# EAGLE board Aux Board V7.0 (EAGLE 9.6.2)
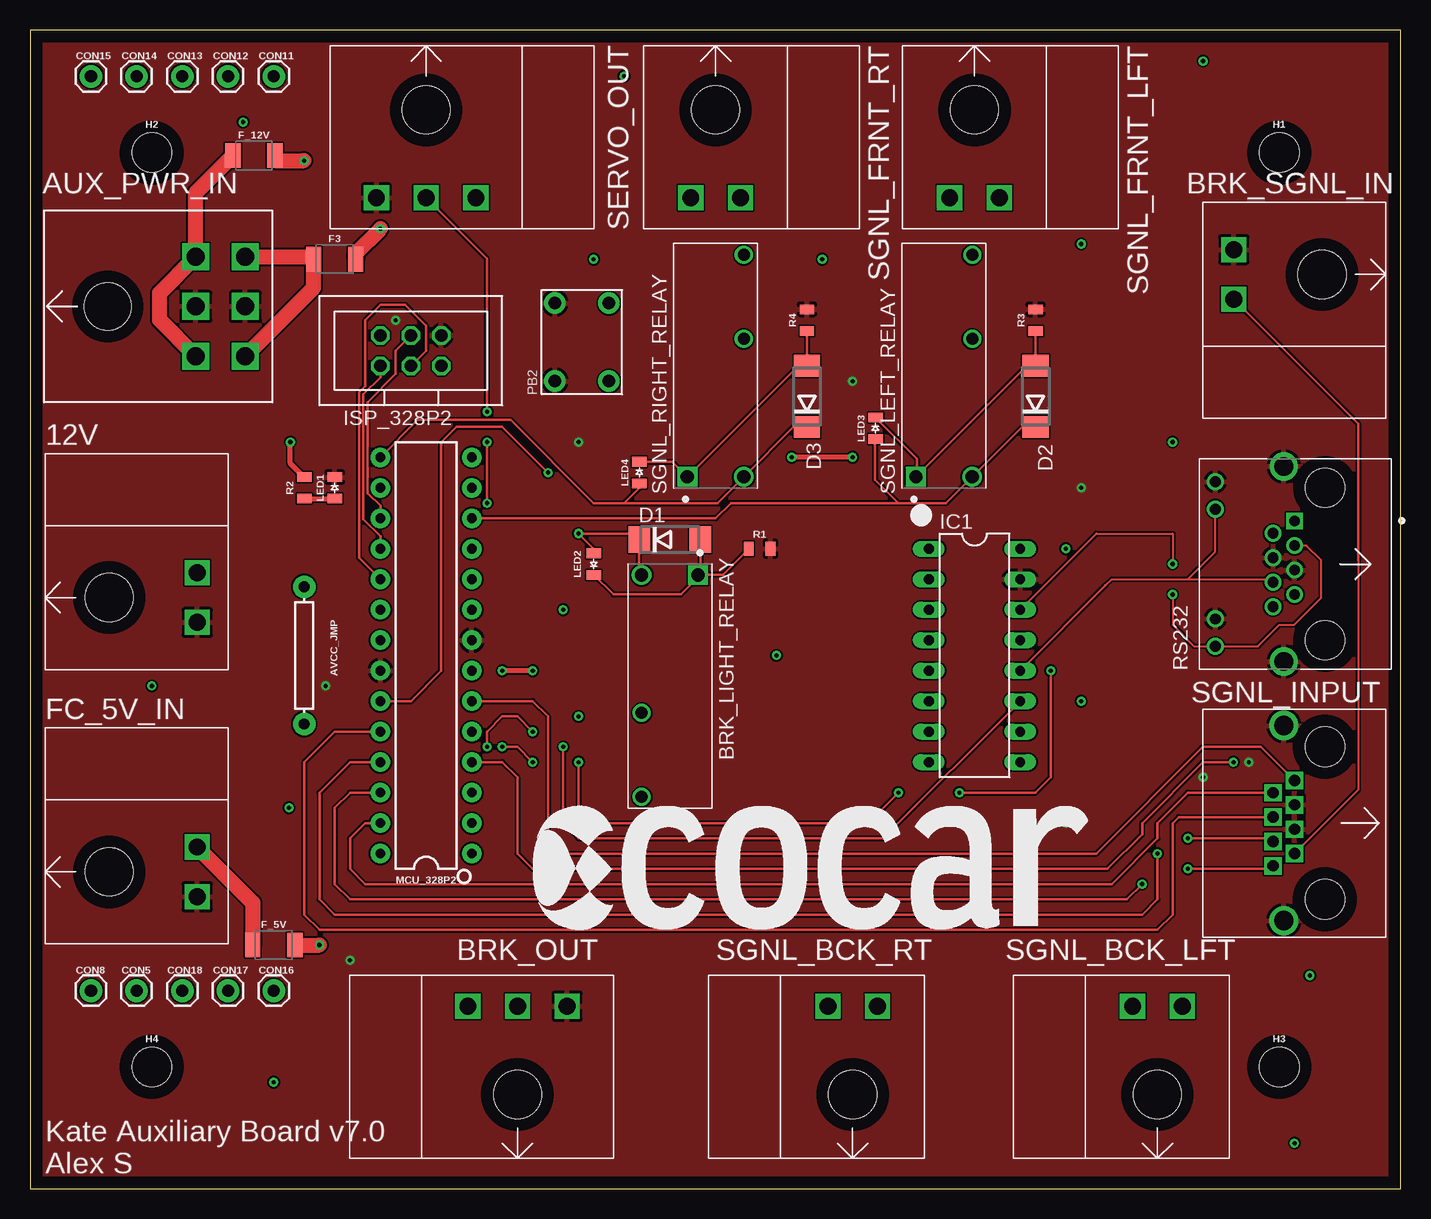
[diagram p0: board, top side]
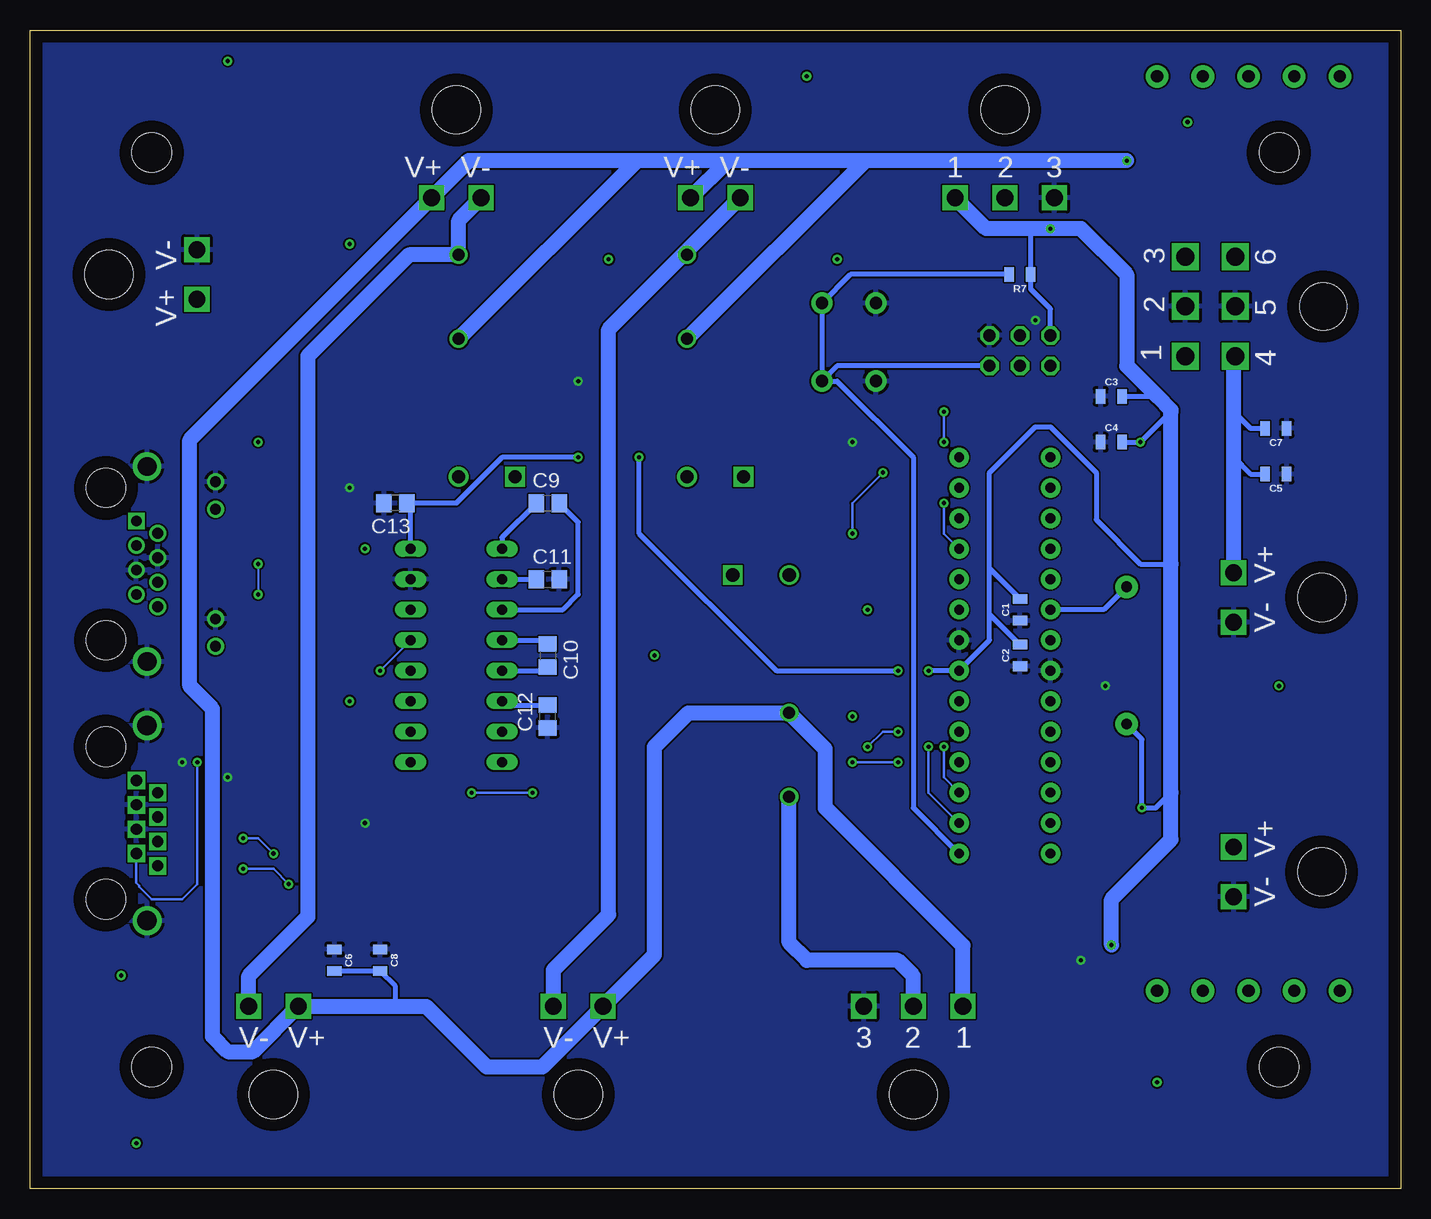
[diagram p1: board, bottom side, seen from below]

Size 114.28 x 96.57 mm. Coordinates in mm from the lower left corner, seen from the top.
Outline: 0,0 114.28,0 114.28,96.57 0,96.57 0,0
Copper layers (1*16): Top 0.035mm / dielectric 1.5mm / Bottom 0.035mm
Design rules "default": minimum track width 6mil, minimum drill 0.35mm, track to track 6mil, track to pad 6mil, pad to pad 6mil, via to via 6mil, smd to smd 6mil, copper to edge 40mil, drill to drill 6mil, minimum pad ring 10mil, minimum via ring 8mil, stop-mask expansion 4mil, vias tented up to drill 0mil, thermal gap 10mil

## Footprints (pad centres in the part's own frame; a part is rotated, then mirrored left to right if it is on the bottom)
TE_2-PIN = drill 1.4 square: 1 -2.07,12.67; 2 2.07,12.67 | hole 4: 0,5.33
TE_6-PIN = drill 1.5 square: 1 4.14,11.48; 2 0,11.48; 3 -4.14,11.48; 4 4.14,7.34; 5 0,7.34; 6 -4.14,7.34 | hole 3.91: 0,0
JUMPER-0.45 = drill 0.9 pad 1.88: P$1 -5.715,0; P$2 5.715,0
TE_1-1721081-2 = drill 1.1 square: 1 -9.25,2.35 | drill 1.1: 2 -9.25,-2.35 | drill 1: 3 2.25,-2.35; 4 9.25,-2.35
TE_3-PIN = drill 1.4 square: 1 -4.14,12.67; 2 0,12.67; 3 4.14,12.67 | hole 4: 0,5.33
0805 = smd 0.8 x 1.2: 1 -0.9,0; 2 0.9,0
C0805 = smd 1.3 x 1.5: 1 -0.95,0; 2 0.95,0
1X01 = drill 1.016 pad 1.88: 1 0,0
DO214AA = smd 1.8 x 2.2: A 2.55,0; C -2.55,0
1210 = smd 1.27 x 2.06: 1 -1.755,0; 2 1.755,0
STAND-OFF = hole 3.302: 0,0
DIP16 = drill 0.813 long: 1 -8.89,-3.81; 2 -6.35,-3.81; 3 -3.81,-3.81; 4 -1.27,-3.81; 5 1.27,-3.81; 6 3.81,-3.81; 7 6.35,-3.81; 8 8.89,-3.81; 9 8.89,3.81; 10 6.35,3.81; 11 3.81,3.81; 12 1.27,3.81; 13 -1.27,3.81; 14 -3.81,3.81; 15 -6.35,3.81; 16 -8.89,3.81
ISP_CONNECTOR = drill 1.016 octagon: 1 2.54,1.27; 2 2.54,-1.27; 3 0,1.27; 4 0,-1.27; 5 -2.54,1.27; 6 -2.54,-1.27
0805_LED = smd 0.8 x 1.2: 1 -0.9,0; 2 0.9,0
DIP28 = drill 0.813 pad 1.626: 1 -16.51,-3.81; 2 -13.97,-3.81; 3 -11.43,-3.81; 4 -8.89,-3.81; 5 -6.35,-3.81; 6 -3.81,-3.81; 7 -1.27,-3.81; 8 1.27,-3.81; 9 3.81,-3.81; 10 6.35,-3.81; 11 8.89,-3.81; 12 11.43,-3.81; 13 13.97,-3.81; 14 16.51,-3.81; 15 16.51,3.81; 16 13.97,3.81; 17 11.43,3.81; 18 8.89,3.81; 19 6.35,3.81; 20 3.81,3.81; 21 1.27,3.81; 22 -1.27,3.81; 23 -3.81,3.81; 24 -6.35,3.81; 25 -8.89,3.81; 26 -11.43,3.81; 27 -13.97,3.81; 28 -16.51,3.81
PUSHBUTTON = drill 1.04 pad 1.778: 1 0,0; 2 6.5,0; 3 0,4.5; 4 6.5,4.5
RJ45_LED = drill 0.89 square: 1 3.58,2.54 | drill 0.89: 2 2.56,4.32; 3 1.54,2.54; 4 0.52,4.32; 5 -0.5,2.54; 6 -1.52,4.32; 7 -2.54,2.54; 8 -3.56,4.32; 9 -6.86,9.14; 10 -4.57,9.14; 11 4.57,9.14; 12 6.86,9.14 | drill 1.57: S1 -8.13,3.43; S2 8.13,3.43 | hole 3.25: -6.35,0; 6.35,0
RJ45 = drill 0.94 square: 1 9.9,2.54; 2 8.88,4.32; 3 7.87,2.54; 4 6.85,4.32; 5 5.84,2.54; 6 4.82,4.32; 7 3.81,2.54; 8 2.79,4.32 | drill 1.62: 9 -1.78,3.43; 10 14.48,3.43 | hole 3.3: 0,0; 12.7,0

## Placement (x,y rotation side)
12V  TE_2-PIN  [TE_2-PIN]  1.27,49.28 270 top
AUX_PWR_IN  TE_6-PIN  [TE_6-PIN]  6.48,73.53 270 top
AVCC_JMP  [JUMPER-0.45]  22.86,44.45 90 top
BRK_LIGHT_RELAY  RELAY_SPST-NO_3A  [TE_1-1721081-2]  53.34,41.91 270 top
BRK_OUT  TE_3-PIN  [TE_3-PIN]  40.64,2.54 0 top
BRK_SGNL_IN  TE_2-PIN  [TE_2-PIN]  113.03,76.2 90 top
C1  0.1u  [0805]  31.75,48.26 90 bottom
C2  10n  [0805]  31.75,44.45 90 bottom
C3  10n  [0805]  24.13,66.04 0 bottom
C4  0.1u  [0805]  24.13,62.23 0 bottom
C5  0.1u  [0805]  10.41,59.56 180 bottom
C6  10n  [0805]  88.9,19.05 270 bottom
C7  10n  [0805]  10.41,63.37 180 bottom
C8  0.1u  [0805]  85.09,19.05 270 bottom
C9  0.1µF  [C0805]  71.12,57.15 0 bottom
C10  0.1µF  [C0805]  71.12,44.45 270 bottom
C11  0.1µF  [C0805]  71.12,50.8 0 bottom
C12  0.1µF  [C0805]  71.12,39.37 90 bottom
C13  0.1µF  [C0805]  83.82,57.15 180 bottom
CON5  1X01  [1X01]  8.89,16.51 0 top
CON8  1X01  [1X01]  5.08,16.51 0 top
CON11  1X01  [1X01]  20.32,92.71 0 top
CON12  1X01  [1X01]  16.51,92.71 0 top
CON13  1X01  [1X01]  12.7,92.71 0 top
CON14  1X01  [1X01]  8.89,92.71 0 top
CON15  1X01  [1X01]  5.08,92.71 0 top
CON16  1X01  [1X01]  20.32,16.51 0 top
CON17  1X01  [1X01]  16.51,16.51 0 top
CON18  1X01  [1X01]  12.7,16.51 0 top
D1  [DO214AA]  53.34,54.1 0 top
D2  [DO214AA]  83.82,66.04 90 top
D3  [DO214AA]  64.77,66.04 90 top
F3  [1210]  25.4,77.47 0 top
F_5V  [1210]  20.32,20.32 0 top
F_12V  [1210]  18.67,86.11 0 top
FC_5V_IN  TE_2-PIN  [TE_2-PIN]  1.27,26.42 270 top
H1  STAND-OFF  [STAND-OFF]  104.14,86.36 0 top
H2  STAND-OFF  [STAND-OFF]  10.16,86.36 0 top
H3  STAND-OFF  [STAND-OFF]  104.14,10.16 0 top
H4  STAND-OFF  [STAND-OFF]  10.16,10.16 0 top
IC1  RS232-TTL_MAX232E  [DIP16]  78.74,44.45 270 top
ISP_328P2  ISP  [ISP_CONNECTOR]  31.75,69.85 180 top
LED1  [0805_LED]  25.4,58.42 90 top
LED2  [0805_LED]  46.99,52.07 270 top
LED3  [0805_LED]  70.48,63.37 90 top
LED4  [0805_LED]  50.8,59.69 90 top
MCU_328P2  328P  [DIP28]  33.02,44.45 90 top
PB2  [PUSHBUTTON]  48.26,67.31 90 top
R1  1K  [0805]  60.83,53.34 0 top
R2  2K  [0805]  22.86,58.42 90 top
R3  1K  [0805]  83.82,72.39 90 top
R4  1K  [0805]  64.77,72.39 90 top
R7  10K  [0805]  31.75,76.2 180 bottom
RS232  RJ45_LED  [RJ45_LED]  107.95,52.07 90 top
SERVO_OUT  TE_3-PIN  [TE_3-PIN]  33.02,95.25 180 top
SGNL_BCK_LFT  TE_2-PIN  [TE_2-PIN]  93.98,2.54 0 top
SGNL_BCK_RT  TE_2-PIN  [TE_2-PIN]  68.58,2.54 0 top
SGNL_FRNT_LFT  TE_2-PIN  [TE_2-PIN]  78.74,95.25 180 top
SGNL_FRNT_RT  TE_2-PIN  [TE_2-PIN]  57.15,95.25 180 top
SGNL_INPUT  RJ45  [RJ45]  107.95,24.13 90 top
SGNL_LEFT_RELAY  RELAY_SPST-NO_3A  [TE_1-1721081-2]  76.2,68.58 90 top
SGNL_RIGHT_RELAY  RELAY_SPST-NO_3A  [TE_1-1721081-2]  57.15,68.58 90 top
U$1  [ECOCAR_LOGO_2018]  41.91,21.59 0 top

## Library data of the parts
12V AUX_PWR_IN BRK_OUT BRK_SGNL_IN FC_5V_IN SERVO_OUT SGNL_BCK_LFT SGNL_BCK_RT SGNL_FRNT_LFT SGNL_FRNT_RT SGNL_INPUT = EcoCar-Connectors
AVCC_JMP C1-C8 R1-R4 R7 = EcoCar-Passives
BRK_LIGHT_RELAY SGNL_LEFT_RELAY SGNL_RIGHT_RELAY = EcoCar-Electromechanical; AVAILABILITY: In Stock; COMMENT: 1-1721081-2; DESCRIPTION: General Purpose Relay SPST-NO (1 Form A) 12VDC Coil Through Hole; MF: TE Connectivity; MP: 1-1721081-2; PACKAGE: None; PRICE: None
C9-C13 = rcl; SPICEPREFIX: C
CON5 CON8 CON11-CON18 = EcoCar-Connectors-2.54mm
D1-D3 LED1-LED4 = EcoCar-Discrete-Semiconductors
F3 F_5V F_12V = EcoCar-Fuses-Protection
H1-H4 U$1 = EcoCar-Miscellaneous
IC1 = EcoCar-Integrated-Circuits
ISP_328P2 = EcoCar-Microcontrollers
MCU_328P2 = EcoCar-Microcontrollers; PROD_ID: IC-09136
PB2 = EcoCar-Electromechanical
RS232 = EcoCar-Connectors; AVAILABILITY: In Stock; COMMENT: 6116173-4; DESCRIPTION: Conn Telephone/Telecom F 8 POS 2.54mm Solder RA Thru-Hole 12 Terminal 1 Port Tray Cat 5; EU_ROHS_COMPLIANCE: Compliant; MF: TE Connectivity; MP: 6116173-4; PACKAGE: None; PRICE: None; PURCHASE-URL: https://pricing.snapeda.com/search/part/6116173-4/?ref=eda

## Nets
5V: AVCC_JMP.P$1 C1.2 C2.2 C3.2 C4.2 C13.1 F3.2 F_5V.2 IC1.16 ISP_328P2.2 MCU_328P2.7 R2.2 R7.1 SERVO_OUT.1
12V: BRK_LIGHT_RELAY.3 BRK_OUT.1 C6.2 C8.2 F_12V.2 SGNL_BCK_LFT.1 SGNL_BCK_RT.1 SGNL_FRNT_LFT.1 SGNL_FRNT_RT.1 SGNL_LEFT_RELAY.3 SGNL_RIGHT_RELAY.3
12V_PRE_FUSE: 12V.1 AUX_PWR_IN.4 AUX_PWR_IN.6 C5.2 C7.2 F_12V.1
BRK_12V: BRK_LIGHT_RELAY.4 BRK_OUT.2
BRK_I/P: BRK_SGNL_IN.1 MCU_328P2.4 SGNL_INPUT.7
BRK_O/P: BRK_LIGHT_RELAY.2 D1.C LED2.1 MCU_328P2.23
GND: 12V.2 AUX_PWR_IN.2 AUX_PWR_IN.5 BRK_OUT.3 BRK_SGNL_IN.2 C1.1 C2.1 C3.1 C4.1 C5.1 C6.1 C7.1 C8.1 C11.2 C12.1 C13.2 FC_5V_IN.2 IC1.15 ISP_328P2.6 LED1.2 MCU_328P2.8 MCU_328P2.22 PB2.3 PB2.4 R1.2 R3.2 R4.2 RS232.4 RS232.5 RS232.10 RS232.12 RS232.S1 RS232.S2 SERVO_OUT.3 SGNL_INPUT.3 SGNL_INPUT.5 SGNL_INPUT.9 SGNL_INPUT.10
HAZARD_I/P: MCU_328P2.6 SGNL_INPUT.1
MISO_328P2: ISP_328P2.1 MCU_328P2.18
MOSI_328P2: ISP_328P2.4 MCU_328P2.17
N$1: BRK_LIGHT_RELAY.1 D1.A LED2.2 R1.1
N$2: AVCC_JMP.P$2 MCU_328P2.20
N$6: C9.2 IC1.3
N$7: C10.2 IC1.5
N$8: LED1.1 R2.1
N$9: C9.1 IC1.1
N$10: C10.1 IC1.4
N$11: C11.1 IC1.2
N$12: C12.2 IC1.6
N$13: D2.A LED3.2 R3.1 SGNL_LEFT_RELAY.1
N$14: D3.A LED4.2 R4.1 SGNL_RIGHT_RELAY.1
N$33: F_5V.1 FC_5V_IN.1
N$36: AUX_PWR_IN.1 AUX_PWR_IN.3 F3.1
RESET_328P2: ISP_328P2.5 MCU_328P2.1 PB2.1 PB2.2 R7.2
RS_RX: IC1.12 RS232.6 RS232.11
RS_TX: IC1.14 RS232.3 RS232.9
RX: IC1.13 MCU_328P2.2
SCK_328P2: ISP_328P2.3 MCU_328P2.19
SERVO_ADC_I/P: MCU_328P2.27 SGNL_INPUT.2
SERVO_I/P: MCU_328P2.24 SGNL_INPUT.4
SERVO_PWM_O/P: MCU_328P2.11 SERVO_OUT.2
SGNL_LEFT_12V: SGNL_BCK_LFT.2 SGNL_FRNT_LFT.2 SGNL_LEFT_RELAY.4
SGNL_LEFT_I/P: MCU_328P2.25 SGNL_INPUT.6
SGNL_LEFT_O/P: D2.C LED3.1 MCU_328P2.12 SGNL_LEFT_RELAY.2
SGNL_RIGHT_12V: SGNL_BCK_RT.2 SGNL_FRNT_RT.2 SGNL_RIGHT_RELAY.4
SGNL_RIGHT_I/P: MCU_328P2.26 SGNL_INPUT.8
SGNL_RIGHT_O/P: D3.C LED4.1 MCU_328P2.15 SGNL_RIGHT_RELAY.2
TX: IC1.11 MCU_328P2.3

## Tracks (layer width: path | path; a pad name or v marks a point on that pad's centre or on a via)
5V  (via drill 0.35)
  Top 0.406: v41.91,43.18 v39.37,43.18 | v68.58,60.96 v63.5,60.96 | R2.2 21.71,60.47 v21.71,62.23
  Top 1.27: F3.2 27.16,77.95 v29.21,80.01 | F_5V.2 v24.13,20.32
  Bottom 0.406: ISP_328P2.2 29.21,73.33 30.85,74.97 R7.1 30.85,79.64 30.48,80.01 | 34.29,47.89 34.29,45.72 MCU_328P2.7 v39.37,43.18 | 34.29,47.89 34.29,51.7 | 34.29,51.7 34.29,59.69 30.48,63.5 29.21,63.5 25.4,59.69 25.4,55.76 21.71,52.07 19.17,52.07 | C2.2 34.29,47.89 | v41.91,43.18 52.07,43.18 63.5,54.61 v63.5,60.96 | v68.58,60.96 74.93,60.96 78.74,57.15 C13.1 82.55,56.83 IC1.16 | C4.2 v21.71,62.23 19.17,64.77 | AVCC_JMP.P$1 21.59,37.47 v21.59,31.75 20.44,31.75 19.17,33.02 | C3.2 20.32,66.04 | C1.2 34.29,51.7
  Bottom 1.27: SERVO_OUT.1 34.59,80.01 30.48,80.01 v29.21,80.01 26.67,80.01 22.86,76.2 22.86,68.58 20.32,66.04 19.17,64.89 19.17,64.77 19.17,52.07 19.17,33.02 19.17,29.09 24.13,24.13 v24.13,20.32
12V  (via drill 0.35)
  Top 1.27: v22.85,85.69 20.42,85.69 F_12V.2
  Bottom 0.406: 83.82,15.21 83.82,16.88 C8.2 C6.2
  Bottom 1.27: v22.85,85.69 44.64,85.69 | 44.64,85.69 56.11,85.69 | SGNL_FRNT_RT.1 56.11,85.69 | 56.11,85.69 63.69,85.69 | 63.69,85.69 77.7,85.69 SGNL_FRNT_LFT.1 100.97,62.42 100.97,41.91 99.06,40.01 99.06,12.7 97.79,11.43 95.69,11.43 SGNL_BCK_LFT.1 83.82,15.21 81.25,15.21 76.2,10.16 71.56,10.16 SGNL_BCK_RT.1 62.23,19.49 62.23,36.83 59.4,39.66 BRK_LIGHT_RELAY.3 47.98,36.65 47.98,31.75 36.5,20.27 BRK_OUT.1 | SGNL_LEFT_RELAY.3 63.69,85.69 | SGNL_RIGHT_RELAY.3 44.64,85.69
12V_PRE_FUSE
  Top 1.27: F_12V.1 13.82,83.01 AUX_PWR_IN.6 10.79,74.65 10.79,72.42 AUX_PWR_IN.4
  Bottom 0.406: 13.94,64.77 12.54,63.37 C7.2 | 13.94,60.96 12.54,59.56 C5.2
  Bottom 1.27: 12V.1 13.94,60.96 13.94,64.77 13.94,69.27 AUX_PWR_IN.4
BRK_12V
  Bottom 1.27: BRK_OUT.2 40.64,17.75 41.94,19.05 49.53,19.05 50.99,20.51 BRK_LIGHT_RELAY.4
BRK_I/P  (via drill 0.35)
  Top 0.152: 110.72,52.4 110.72,33.25 SGNL_INPUT.7
  Top 0.203: 110.72,52.4 110.72,63.77 BRK_SGNL_IN.1 | MCU_328P2.4 39.37,35.56 40.64,34.29 40.64,27.94 41.91,26.67 89.81,26.67 92.71,29.57 92.71,30.48 97.79,35.56 v100.33,35.56
  Bottom 0.203: v100.33,35.56 100.33,25.4 101.6,24.13 104.14,24.13 105.18,25.17 105.18,25.28 105.41,25.5 SGNL_INPUT.7
BRK_O/P  (via drill 0.35)
  Top 0.203: MCU_328P2.23 31.75,40.64 34.29,43.18 34.29,62.23 35.56,63.5 39.37,63.5 v43.18,59.69 | BRK_LIGHT_RELAY.2 50.79,51.36 D1.C 50.28,54.61 v45.72,54.61 46.99,53.34 LED2.1
  Bottom 0.203: v43.18,59.69 45.72,57.15 v45.72,54.61
GND  (via drill 0.35)
  other vias: 26.67,19.05 30.48,72.39 24.64,41.91 68.58,67.31 101.6,35.56 97.79,34.29 86.36,30.48 87.63,58.42 45.72,62.23
  pour Top: -2.54,99.06 -2.54,-2.54 116.84,-2.54 116.84,99.06
  pour Bottom: -5.08,101.6 -5.08,-5.08 119.38,-5.08 119.38,101.6
HAZARD_I/P
  Top 0.203: MCU_328P2.6 41.91,40.64 43.18,39.37 43.18,29.21 44.45,27.94 88.9,27.94 97.79,36.83 102.61,36.83 SGNL_INPUT.1
MISO_328P2
  Top 0.203: ISP_328P2.1 29.21,67.65 27.79,66.22 27.79,55.79 29.21,54.37 MCU_328P2.18
MOSI_328P2
  Top 0.203: MCU_328P2.17 29.21,56.91 28.14,57.98 28.14,65.57 30.48,67.91 30.48,69.85 ISP_328P2.4
N$1
  Top 0.203: R1.1 57.75,51.16 55.88,51.16 | 55.88,51.16 BRK_LIGHT_RELAY.1 55.89,51.36 D1.A | LED2.2 48.63,49.53 54.25,49.53 55.88,51.16
N$2
  Bottom 0.406: AVCC_JMP.P$2 24.77,48.26 MCU_328P2.20
N$3  (via drill 0.35)
  other vias: 20.32,8.89
N$4  (via drill 0.35)
  other vias: 44.45,48.26
N$5  (via drill 0.35)
  other vias: 46.99,77.47
N$6
  Bottom 0.406: IC1.3 69.85,48.26 68.58,49.53 68.58,55.56 C9.2
N$7
  Bottom 0.406: IC1.5 71.44,43.18 C10.2
N$8
  Top 0.406: R2.1 LED1.1
N$9
  Bottom 0.406: C9.1 74.93,54.29 IC1.1
N$10
  Bottom 0.406: IC1.4 71.44,45.72 C10.1
N$11
  Bottom 0.406: IC1.2 C11.1
N$12
  Bottom 0.406: IC1.6 74.61,40.32 C12.2
N$13
  Top 0.203: R3.1 D2.A 83.11,68.59 73.94,59.42 | SGNL_LEFT_RELAY.1 73.94,59.42 | LED3.2 73.94,60.82 73.94,59.42
N$14
  Top 0.203: R4.1 D3.A 64.06,68.59 SGNL_RIGHT_RELAY.1 53.54,60.59 LED4.2
N$15  (via drill 0.35)
  other vias: 17.78,88.9
N$16  (via drill 0.35)
  other vias: 105.41,3.81
N$17  (via drill 0.35)
  other vias: 106.68,17.78
N$18  (via drill 0.35)
  other vias: 97.79,93.98
N$19  (via drill 0.35)
  other vias: 95.25,62.23
N$20  (via drill 0.35)
  other vias: 87.63,78.74
N$21  (via drill 0.35)
  other vias: 66.04,77.47
N$22  (via drill 0.35)
  other vias: 49.53,92.71
N$23  (via drill 0.35)
  other vias: 10.16,41.91
N$24  (via drill 0.35)
  other vias: 62.23,44.45
N$25  (via drill 0.35)
  other vias: 45.72,39.37
N$26  (via drill 0.35)
  other vias: 87.63,40.64
N$27  (via drill 0.35)
  other vias: 86.36,53.34
N$33
  Top 1.27: FC_5V_IN.1 18.57,23.86 F_5V.1
N$36
  Top 1.27: AUX_PWR_IN.1 23.64,75.08 F3.1 23.44,77.67 AUX_PWR_IN.3
RESET_328P2
  Bottom 0.406: R7.2 45.87,76.2 PB2.2 PB2.1 | PB2.1 46.99,67.31 40.64,60.96 40.64,31.75 MCU_328P2.1 | ISP_328P2.5 46.99,68.58 PB2.1
RS_RX
  Top 0.152: RS232.6 103.38,50.8 96.52,50.8 | 89.66,50.29 90.17,50.8 96.52,50.8 | 96.52,50.8 98.81,53.09 RS232.11
  Top 0.203: IC1.12 89.66,50.29
RS_TX  (via drill 0.35)
  Top 0.152: 88.89,54.6 88.9,54.61 95.25,54.61 v95.25,52.07 | RS232.3 106.4,53.61 107.63,52.38 107.63,49.53 107.63,49.35 107.63,49.25 105.38,46.99 104.14,46.99 102.36,45.21 RS232.9 97.03,45.21 95.25,46.99 v95.25,49.53
  Top 0.203: IC1.14 88.89,54.6
  Bottom 0.152: v95.25,52.07 v95.25,49.53
RX  (via drill 0.35)
  Top 0.203: v39.37,36.83 40.64,36.83 v41.91,35.56 | v45.72,35.56 45.72,31.75 46.99,30.48 69.85,30.48 v72.39,33.02 | v77.47,33.02 83.82,33.02 85.09,34.29 v85.09,43.18
  Bottom 0.203: MCU_328P2.2 39.37,33.02 v39.37,36.83 | v41.91,35.56 v45.72,35.56 | v72.39,33.02 v77.47,33.02 | v85.09,43.18 IC1.13
SCK_328P2
  Top 0.203: MCU_328P2.19 27.43,52.58 27.43,66.37 27.94,66.88 27.94,72.39 29.21,73.66 31.28,73.66 33.02,71.92 33.02,69.85 ISP_328P2.3
SERVO_ADC_I/P
  Top 0.203: MCU_328P2.27 27.94,30.48 26.67,29.21 26.67,26.67 27.94,25.4 90.17,25.4 93.98,29.21 93.98,30.48 96.52,33.02 SGNL_INPUT.2
SERVO_I/P
  Top 0.203: MCU_328P2.24 25.4,38.1 22.86,35.56 22.86,22.86 24.13,21.59 93.98,21.59 95.25,22.86 95.25,30.48 95.75,30.98 SGNL_INPUT.4
SERVO_PWM_O/P  (via drill 0.35)
  Top 0.203: SERVO_OUT.2 38.1,77.5 v38.1,64.77 | v38.1,57.15 v38.1,62.23
  Bottom 0.203: MCU_328P2.11 38.1,54.61 v38.1,57.15 | v38.1,62.23 v38.1,64.77
SGNL_LEFT_12V
  Bottom 1.27: SGNL_BCK_LFT.2 96.05,17.75 91.12,22.67 91.12,69.39 82.69,77.83 SGNL_LEFT_RELAY.4 78.55,80.7 SGNL_FRNT_LFT.2
SGNL_LEFT_I/P  (via drill 0.35)
  Top 0.203: MCU_328P2.25 26.67,35.56 24.13,33.02 24.13,24.13 25.4,22.86 92.71,22.86 93.98,24.13 v93.98,27.94 | v96.52,29.21 103.37,29.21 SGNL_INPUT.6
  Bottom 0.203: v93.98,27.94 95.25,29.21 v96.52,29.21
SGNL_LEFT_O/P
  Top 0.152: LED3.1 70.46,62.45
  Top 0.203: D2.C 82.71,63.49 SGNL_LEFT_RELAY.2 76.37,57.15 72.39,57.15 | MCU_328P2.12 57.15,55.88 58.42,57.15 72.39,57.15 | 70.46,62.45 70.46,59.08 72.39,57.15
SGNL_RIGHT_12V
  Bottom 1.27: SGNL_BCK_RT.2 70.65,18.25 66.04,22.86 66.04,71.62 59.5,78.16 | SGNL_FRNT_RT.2 59.5,78.16 | 59.5,78.16 SGNL_RIGHT_RELAY.4
SGNL_RIGHT_I/P  (via drill 0.35)
  Top 0.203: MCU_328P2.26 26.67,33.02 25.4,31.75 25.4,25.4 26.67,24.13 91.44,24.13 v92.71,25.4 | v96.52,26.67 103.38,26.67 SGNL_INPUT.8
  Bottom 0.203: v92.71,25.4 93.98,26.67 v96.52,26.67
SGNL_RIGHT_O/P
  Top 0.203: MCU_328P2.15 32.33,64.08 40.06,64.08 46.99,57.15 49.53,57.15 | 49.53,57.15 57.32,57.15 SGNL_RIGHT_RELAY.2 63.66,63.49 D3.C | LED4.1 50.8,58.42 49.53,57.15
TX  (via drill 0.35)
  Top 0.203: v38.1,36.83 38.1,38.1 39.37,39.37 40.64,39.37 v41.91,38.1 | v44.45,36.83 44.45,30.48 45.72,29.21 71.12,29.21 IC1.11
  Bottom 0.203: v38.1,36.83 38.1,34.29 MCU_328P2.3 | v41.91,38.1 43.18,38.1 v44.45,36.83

## Text on the board
tNames: Kate Auxiliary Board v7.0 / Alex S